# Altium PCB STM32.PcbDoc
Units mm, origin at the board's own origin, x right, y up, seen from the top; angles counter-clockwise.
Board outline 38.86 x 35.18 mm, 4 copper layers (L1 SIGNAL, L2 GROUND, L3 GROUND, L4 SIGNAL), stack 1.571 mm thick; 35 components, 27 nets, 170 pads, 85 vias.
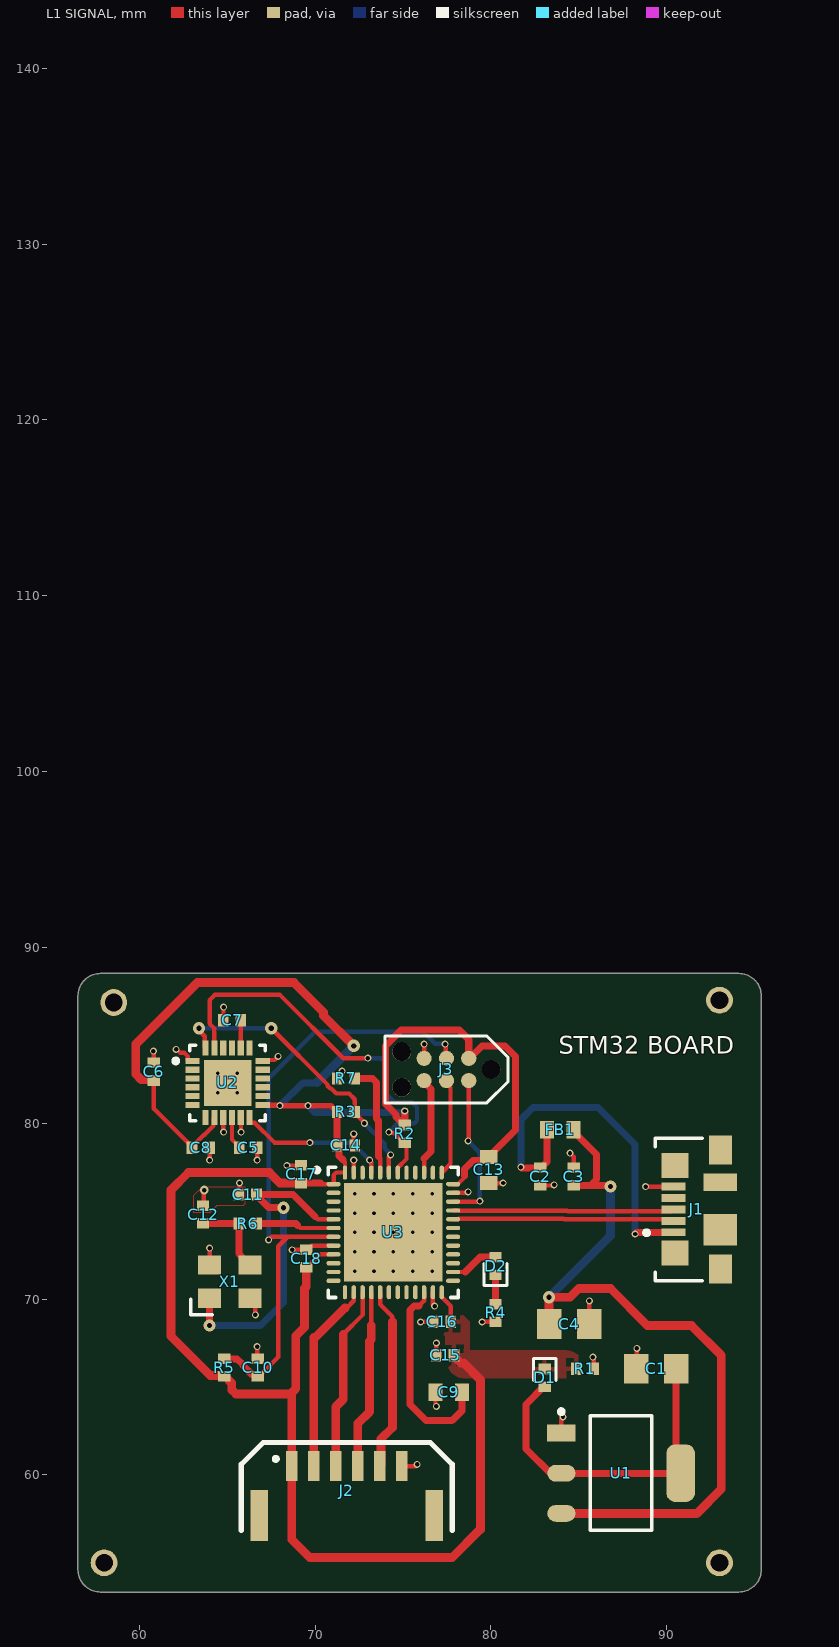
[diagram p0: L1 SIGNAL view]
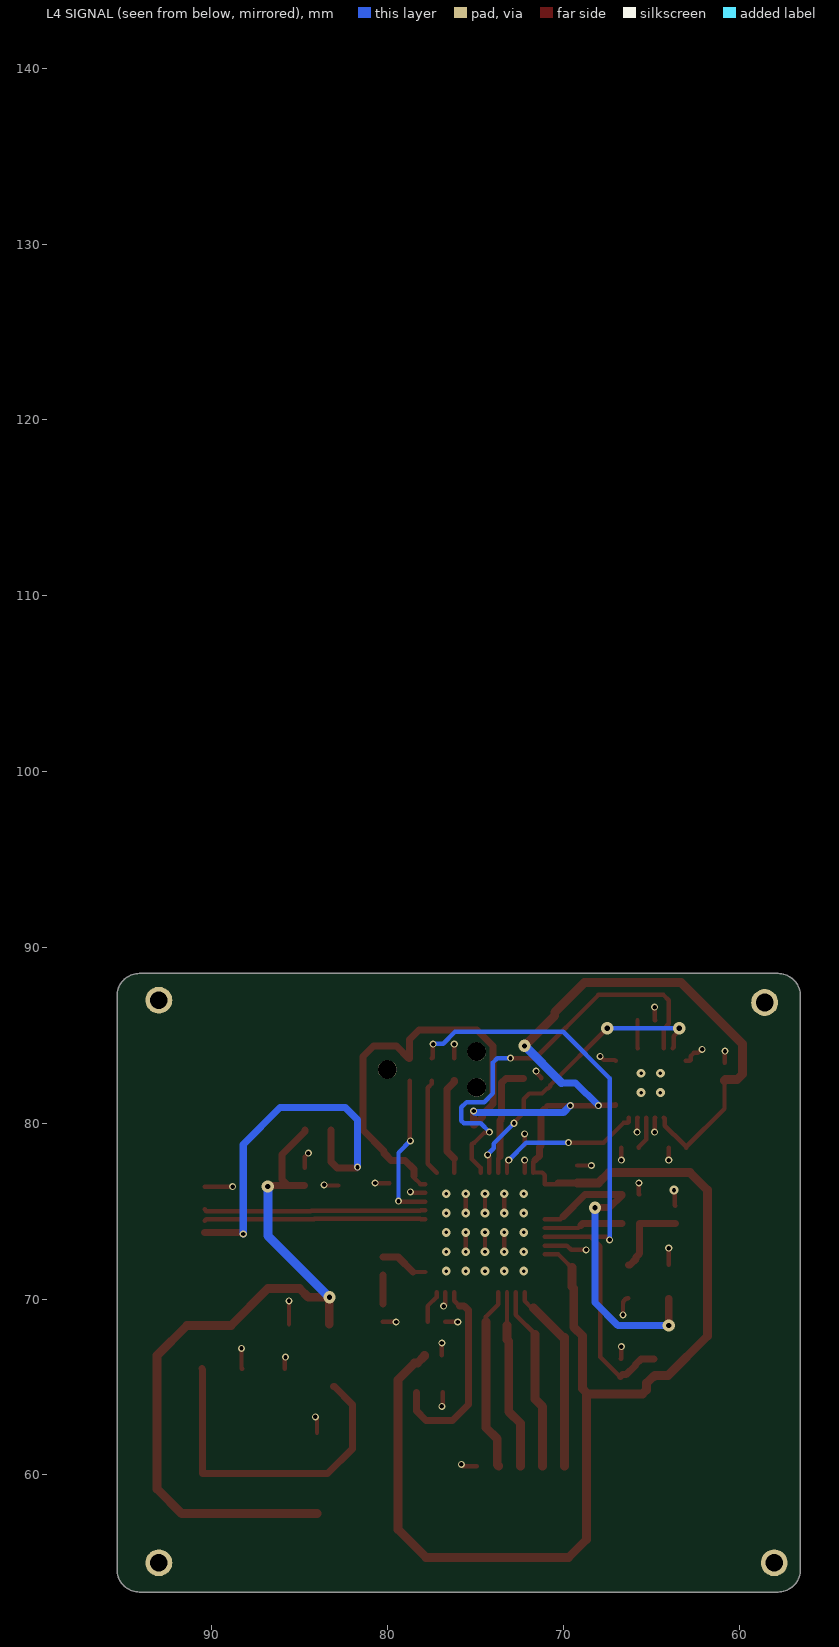
[diagram p1: L4 SIGNAL view, seen from below]
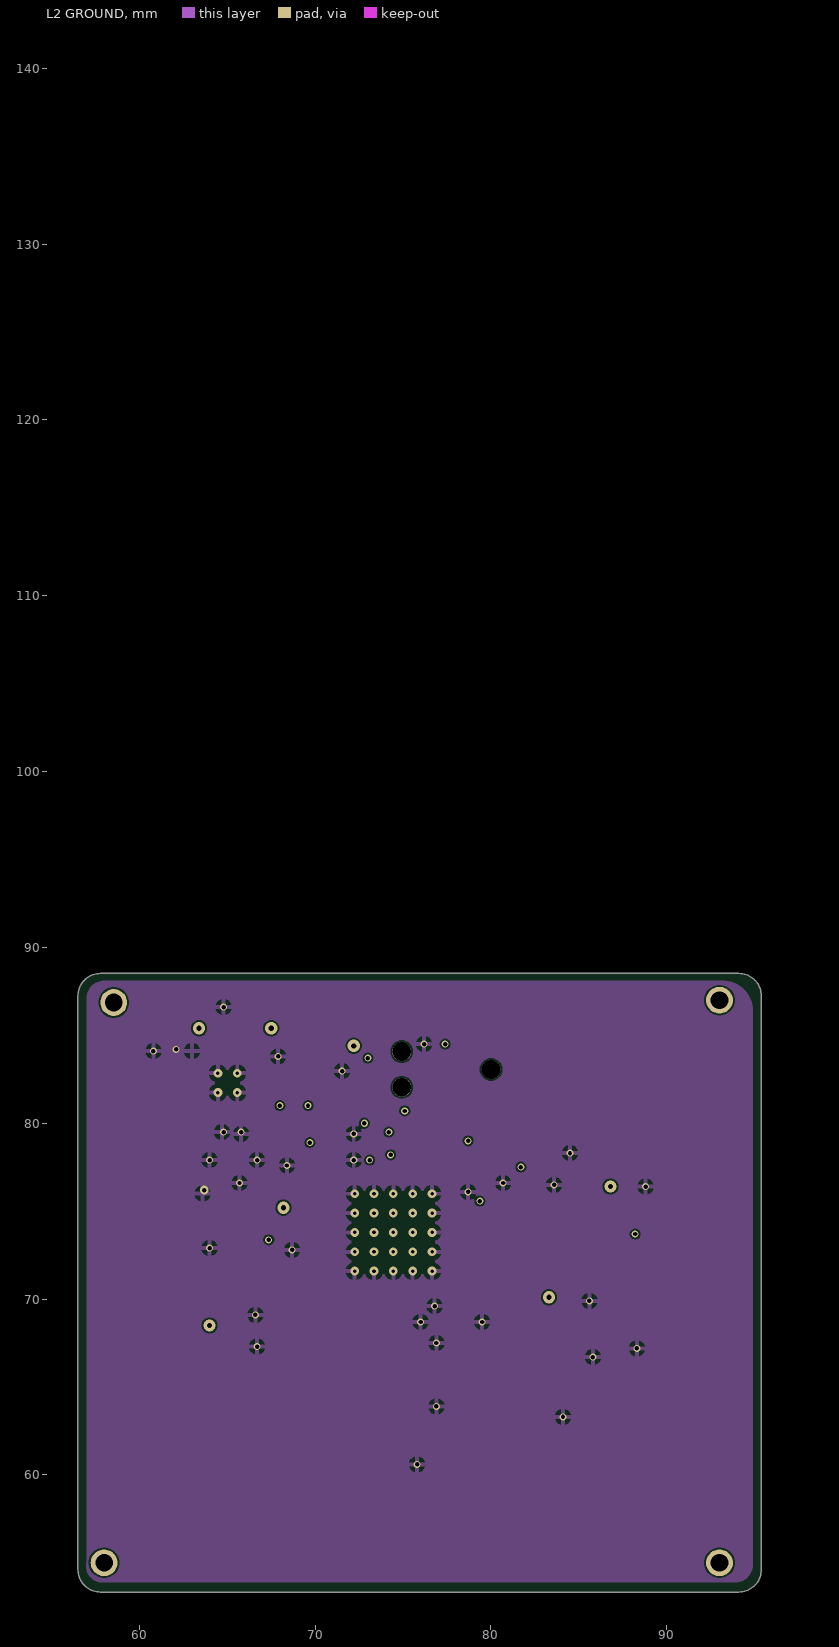
[diagram p2: L2 GROUND]
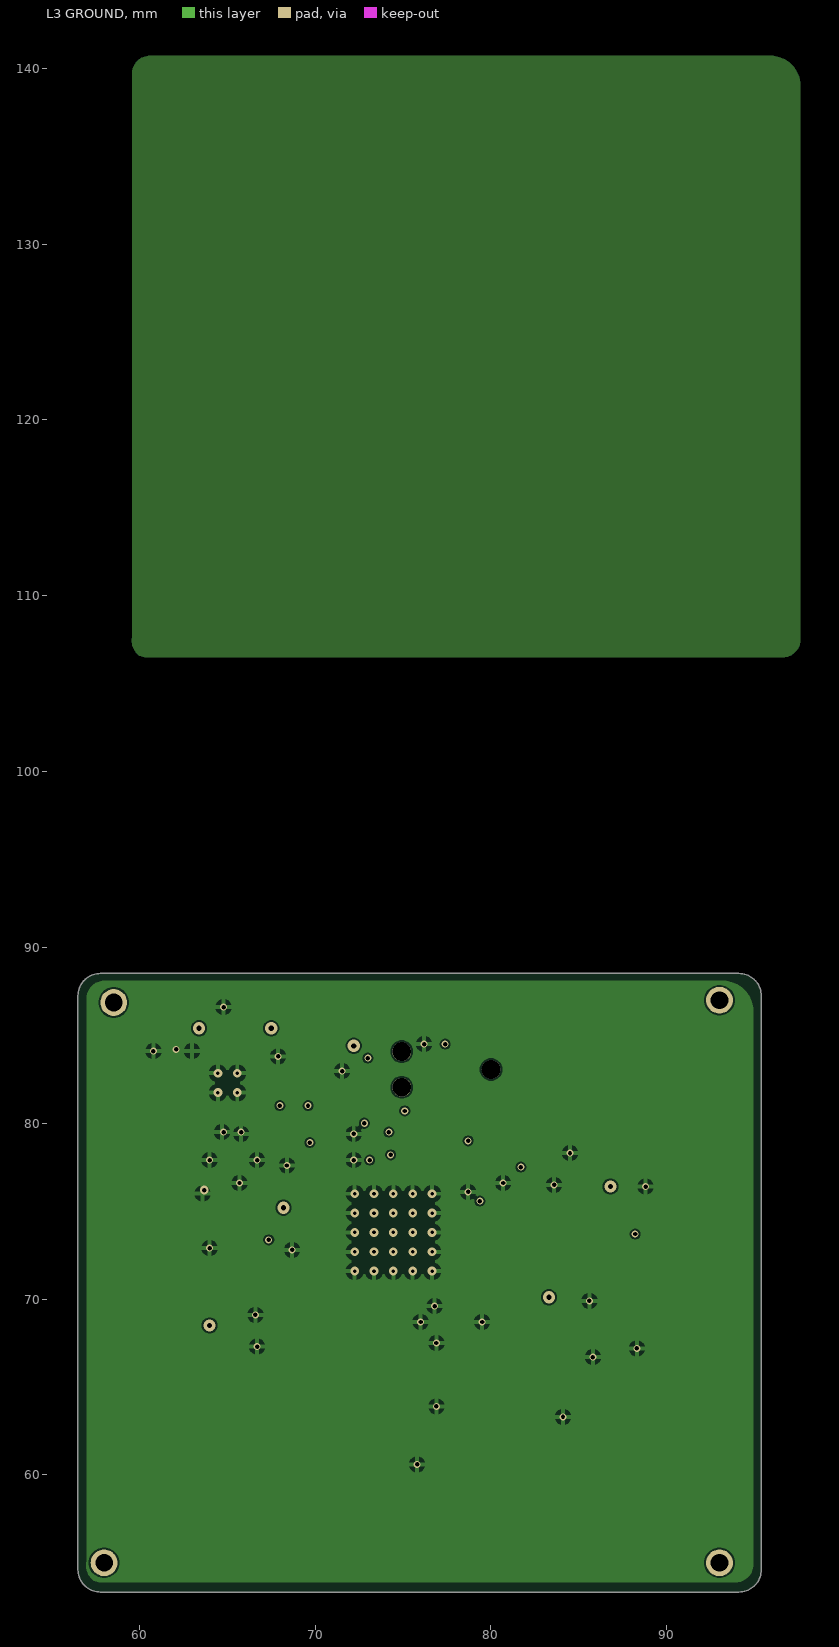
[diagram p3: L3 GROUND]
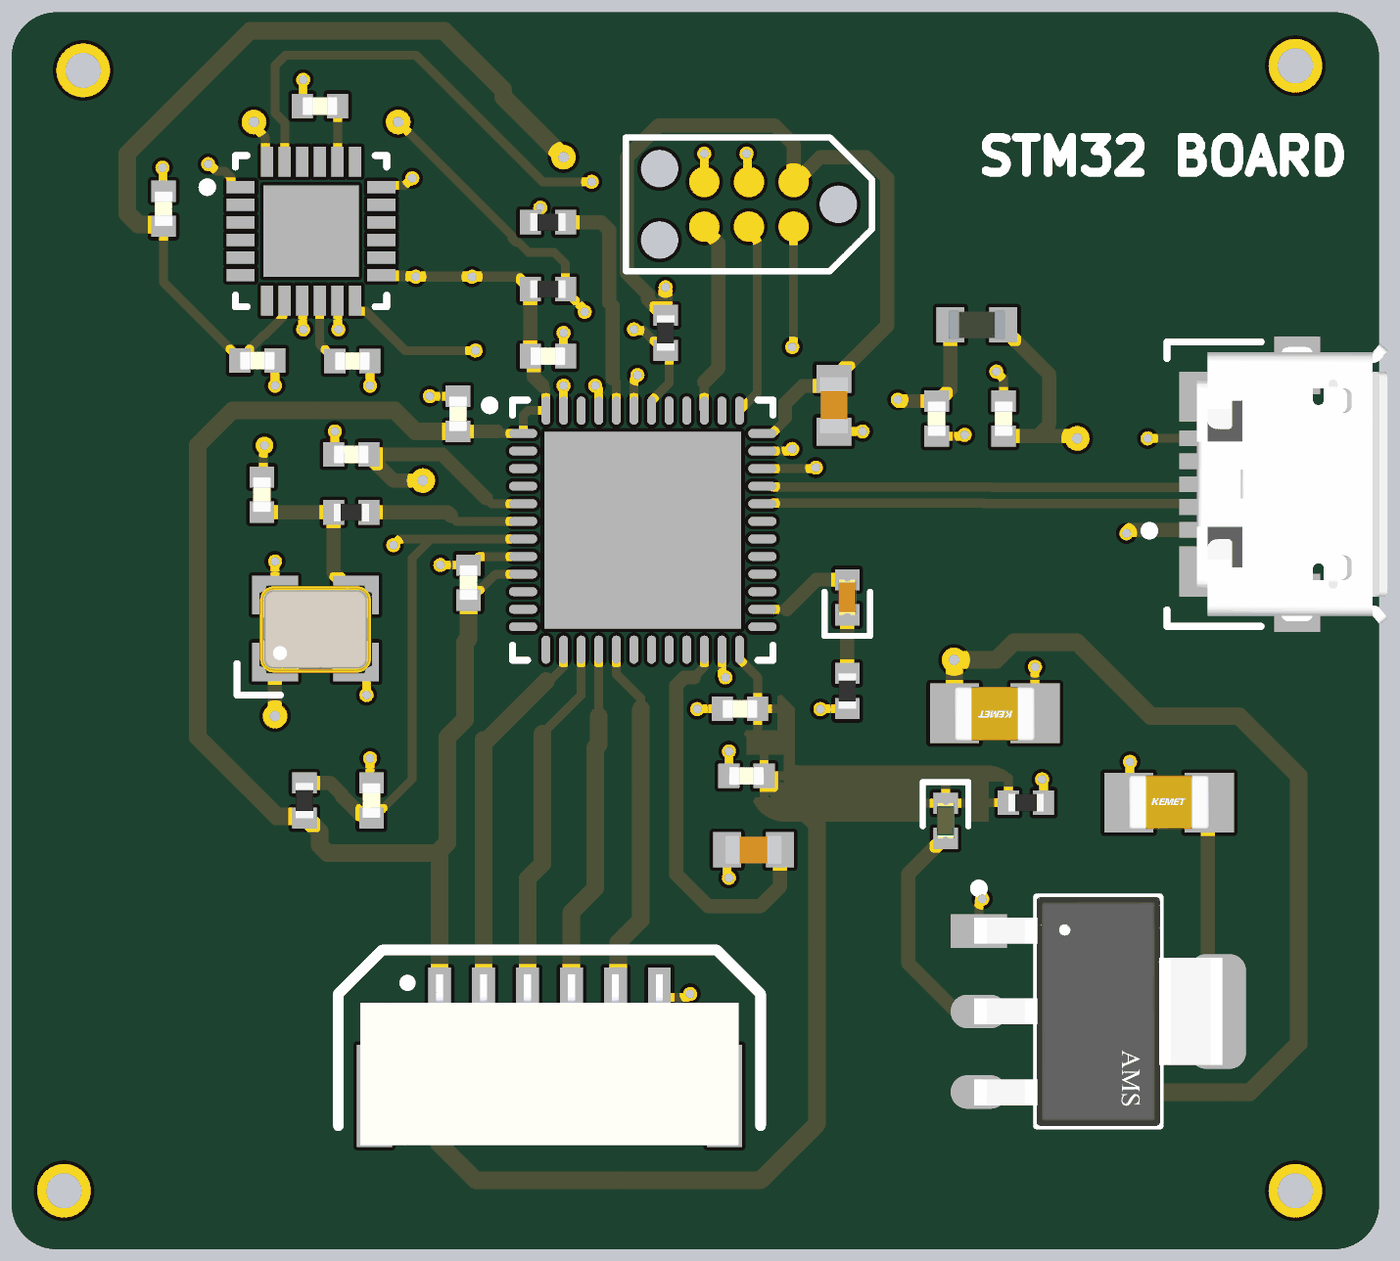
[diagram p4: 3D render of the assembled board from above, using the file's embedded part models]

## Layer stack, top to bottom
Top Solder: solder mask 0.0254, SM-001, Dk 4
L1 SIGNAL: signal copper 0.035
Dielectric 1: prepreg 0.2, PP-017, Dk 4.6
L2 GROUND: signal copper 0.018
Dielectric 3: core 1.065, Core-039, Dk 4.6
L3 GROUND: signal copper 0.018
Dielectric 5: prepreg 0.2, PP-017, Dk 4.6
L4 SIGNAL: signal copper 0.035
Bottom Solder: solder mask 0.0254, SM-001, Dk 4

## Board outline
56.515,54.61 56.515,87.249 cw(c57.785,87.249) 57.785,88.519 94.107,88.519 cw(c94.107,87.249) 95.377,87.249 95.377,54.61 cw(c94.107,54.61) 94.107,53.34 57.785,53.34 cw(c57.785,54.61)

## Design rules (kind name [scope] priority, off if disabled: settings)
Clearance [All] p1: gap=0.1 ignorepadtopadclearanceinfootprint=FALSE
DiffPairsRouting [All] p1: maxlimit=0.254 minlimit=0.203 mostfreqgap=0.254 toplayer_maxgap=0.203 toplayer_prefgap=0.203 toplayer_minwidth=0.26 toplayer_maxwidth=0.26 toplayer_prefwidth=0.26 bottomlayer_maxgap=0.203 bottomlayer_prefgap=0.203 bottomlayer_minwidth=0.26 bottomlayer_maxwidth=0.26 bottomlayer_prefwidth=0.26 impedanceprofiledriven=TRUE impedanceprofileid={10750222-0E24-40B5-9E8B-FD8138095507} impedanceprofilevalue=90.000000 maxuncoupledlength=12.7
MinimumSolderMaskSliver [All] p1: minsoldermaskwidth=0
PlaneConnect [All] p1: planeconnectstyle=Direct reliefexpansion=0.508 reliefentries=4 reliefconductorwidth=0.254 reliefairgap=0.254
PolygonConnect [All] p1: connectstyle=Relief reliefconductorwidth=0.254 reliefentries=4 polygonreliefangle="90 Angle" airgapwidth=0.254
RoutingVias [All] p1: holewidth=0.3 width=0.7 viastyle="Through Hole" minholewidth=0.2 minwidth=0.2 maxholewidth=0.5 maxwidth=1
SilkToSilkClearance [All] p1: silktosilkclearance=0.1
SilkToSolderMaskClearance [IsPad] p1: minsilkscreentomaskgap=0.1 clearancetoexposedcopper=TRUE
SolderMaskExpansion [All] p1: expansion=0.102 istentingtop=FALSE
UnRoutedNet [All] p1: checkbadconnections=TRUE
Width [All] p1: maxlimit=0.5 minlimit=0.2 preferedwidth=0.2
24 further rules are at their usual default settings.

## Classes and differential pairs
differential pair class "DIFF USB": USB_D
differential pair USB_D: +USB_D_P -USB_D_N

## Components (designator, comment, footprint, x,y, rotation, side; value= is the part's Value field where it differs from the comment)
C1 "22u" CAP_0805 89.408,66.04 r0 top
C2 "2n2" CAP_0402 82.804,76.962 r90 top
C3 "2n2" CAP_0402 84.709,76.962 r270 top
C4 "22u" CAP_0805 84.455,68.58 r180 top
C5 "100n" CAP_0402 66.2,78.6 r180 top
C6 "100n" CAP_0402 60.833,82.931 r270 top
C7 "2n2" CAP_0402 65.278,85.852 r0 top
C8 "100n" CAP_0402 63.5,78.613 r180 top
C9 "2u2" CAP_0603 77.6,64.7 r0 top
C10 "100n" CAP_0402 66.741,66.1 r270 top
C11 "10p" CAP_0402 66.167,75.946 r0 top
C12 "10p" CAP_0402 63.627,74.803 r270 top
C13 "2u2" CAP_0603 79.883,77.343 r90 top
C14 "100n" CAP_0402 71.755,78.74 r180 top
C15 "100n" CAP_0402 77.4,66.8 r0 top
C16 "100n" CAP_0402 77.216,68.707 r0 top
C17 "100n" CAP_0402 69.2,77.1 r270 top
C18 "100n" CAP_0402 69.5,72.3 r270 top
D1 "GREEN" LED_0402_GREEN 83.058,65.524 r90 top
D2 "RED" LED_0402_RED 80.264,71.882 r270 top
FB1 "120R" FB_0603 83.947,79.629 r0 top
J1 "473460001" FP-473460001-MFG 92.7,75.1 r90 top
J2 "SM06B-GHS-TB" SM06B-GHS-TB 71.8,59.1 r0 top
J3 "TC2030-NL" TC2030-NL-FP 77.47,83.058 r180 top
R1 "1K" RES_0402 85.344,66.04 r180 top
R2 "2K2" RES_0402 75.1,79.4 r90 top
R3 "2K2" RES_0402 71.755,80.645 r180 top
R4 "1K" RES_0402 80.264,69.215 r90 top
R5 "10K" RES_0402 64.836,66.1 r270 top
R6 "0R" RES_0402 66.167,74.295 r0 top
R7 "10K" RES_0402 71.755,82.55 r0 top
U1 "AMS1117-3.3" FP-AMS1117-IPC_A 87.4,60.1 r0 top
U2 "MPU-6050" IS-QFN-24_V 65.024,82.296 r0 top
U3 "STM32F411CEU6" STM-UFQFPN48_L 74.451,73.791 r0 top
X1 "24MHz" XTAL_3225 65.151,70.993 r0 top

## Footprints (in the part's own frame and the unit in brackets; to place one, negate y for a bottom-side part, rotate by r counter-clockwise, add the part's x,y. Pads: shape width x height; smd on the part's side, far side on the other; paste and mask are expansions set on the pad)
CAP_0402 [mm]
  rect 0.6x0.7 smd: 1(-0.5,0) 2(0.5,0)
  body extent -0.5,-0.26 0.5,0.26, height 0.37
CAP_0603 [mm]
  rect 0.8x1 smd: 1(-0.75,0) 2(0.75,0)
  body extent -0.8,-0.4 0.8,0.4, height 0.51
CAP_0805 [mm]
  rect 1.4x1.7 smd: 1(-1.143,0) 2(1.143,0)
  body extent -1.15,-0.76 1.15,0.79, height 1.01
FB_0603 [mm]
  rect 0.8x1 smd: 1(-0.75,0) 2(0.75,0)
  body extent -0.8,-0.4 0.8,0.4, height 0.81
FP-473460001-MFG [mm]
  rect 0.45x1.38 smd paste+0 mask+0: 1(-1.3,2.31) 2(-0.65,2.31) 3(0,2.31) 4(0.65,2.31) 5(1.3,2.31)
  rect 1.425x1.55 smd paste+0 mask+0: 6(-2.488,2.225) 7(2.488,2.225)
  rect 1.65x1.3 smd paste+0 mask+0: 8(-3.375,-0.35) 11(3.375,-0.35)
  rect 1.8x1.9 smd paste+0 mask+0: 9(-1.15,-0.35)
  rect 1x1.9 smd paste+0 mask+0: 10(1.55,-0.35)
  silkscreen extent -4.05,0.67 4.05,3.97, body extent -4.3,-2.48 4.3,3.45, height 0.25
FP-AMS1117-IPC_A [mm]
  rect 1.604x0.952 smd paste+0 mask+0: 1(-3.395,2.29)
  rrect100% 1.604x0.952 smd paste+0 mask+0: 2(-3.395,0) 3(-3.395,-2.29)
  rrect59% 1.604x3.262 smd paste+0 mask+0: 4(3.395,0)
  silkscreen extent -3.52,-3.25 1.75,3.62, body extent -4.7,-3.75 4.7,3.75, height 0.25
IS-QFN-24_V [mm] "QFN, 24-Leads, Body 4x4mm, Pitch 0.5mm, Thermal Pad 2.7x2.6mm"
  rect 0.8x0.35 smd: 1(-2,1.25) 2(-2,0.75) 3(-2,0.25) 4(-2,-0.25) 5(-2,-0.75) 6(-2,-1.25) 13(2,-1.25) 14(2,-0.75) 15(2,-0.25) 16(2,0.25) 17(2,0.75) 18(2,1.25)
  rect 0.35x0.85 smd mask+0.102: 7(-1.25,-1.975) 8(-0.75,-1.975) 9(-0.25,-1.975) 10(0.25,-1.975) 11(0.75,-1.975) 12(1.25,-1.975) 19(1.25,1.975) 20(0.75,1.975) 21(0.25,1.975) 22(-0.25,1.975) 23(-0.75,1.975) 24(-1.25,1.975)
  rect 2.7x2.6 smd: 25(0,0)
  silkscreen extent -3.07,-2.15 2.15,2.15, body extent -2,-2 2,2, height 0.95
LED_0402_GREEN [mm]
  rect 0.6x0.7 smd: A(-0.5,0) K(0.5,0)
  silkscreen extent -0.15,-0.65 1.1,0.65, body extent -0.51,-0.25 0.51,0.25, height 0.45
LED_0402_RED [mm]
  rect 0.6x0.7 smd: A(-0.5,0) K(0.5,0)
  silkscreen extent -0.15,-0.65 1.1,0.65, body extent -0.51,-0.25 0.51,0.25, height 0.45
RES_0402 [mm]
  rect 0.6x0.7 smd: 1(-0.5,0) 2(0.5,0)
  body extent -0.5,-0.25 0.5,0.25, height 0.3
SM06B-GHS-TB [mm]
  rect 0.65x1.7 smd: 1(-3.125,1.4) 2(-1.875,1.4) 3(-0.625,1.4) 4(0.625,1.4) 5(1.875,1.4) 6(3.125,1.4)
  rect 1x2.9 smd: ""(-4.975,-1.4) ""(4.975,-1.4)
  silkscreen extent -6,-2.25 6,2.75, body extent -5.38,-2.8 5.38,2.05, height 4.26
STM-UFQFPN48_L [mm] "QFN, 48-Leads, Body 7.1x7.1mm, Pitch 0.5mm, Thermal Pad 5.6x5.6mm, IPC High Density"
  oval 0.8x0.25 smd: 1(-3.4,2.75) 2(-3.4,2.25) 3(-3.4,1.75) 4(-3.4,1.25) 5(-3.4,0.75) 6(-3.4,0.25) 7(-3.4,-0.25) 8(-3.4,-0.75) 9(-3.4,-1.25) 10(-3.4,-1.75) 11(-3.4,-2.25) 12(-3.4,-2.75) 25(3.4,-2.75) 26(3.4,-2.25) 27(3.4,-1.75) 28(3.4,-1.25) 29(3.4,-0.75) 30(3.4,-0.25) 31(3.4,0.25) 32(3.4,0.75) 33(3.4,1.25) 34(3.4,1.75) 35(3.4,2.25) 36(3.4,2.75)
  oval 0.25x0.8 smd: 13(-2.75,-3.4) 14(-2.25,-3.4) 15(-1.75,-3.4) 16(-1.25,-3.4) 17(-0.75,-3.4) 18(-0.25,-3.4) 19(0.25,-3.4) 20(0.75,-3.4) 21(1.25,-3.4) 22(1.75,-3.4) 23(2.25,-3.4) 24(2.75,-3.4) 37(2.75,3.4) 38(2.25,3.4) 39(1.75,3.4) 40(1.25,3.4) 41(0.75,3.4) 42(0.25,3.4) 43(-0.25,3.4) 44(-0.75,3.4) 45(-1.25,3.4) 46(-1.75,3.4) 47(-2.25,3.4) 48(-2.75,3.4)
  rect 5.6x5.6 smd: 49(0,0)
  silkscreen extent -4.47,-3.7 3.7,3.7, body extent -3.55,-3.55 3.55,3.55, height 0.6
TC2030-NL-FP [mil]
  round 33.98 smd paste-16.99: 1(-50,-25) 2(-50,25) 3(0,-25) 4(0,25) 5(50,-25) 6(50,25)
  round 42.01 hole 42.01 unplated: MH(-100,0) MH(100,-40) MH(100,40)
  silkscreen extent -138,-75 138,75
XTAL_3225 [mm]
  rect 1.3x1.1 smd: 1(-1.15,-0.95) 2(1.15,-0.95) 3(1.15,0.95) 4(-1.15,0.95)
  silkscreen extent -2.23,-1.89 -1,-1, body extent -1.6,-1.28 1.6,1.22, height 0.61

## Part data
C1 C4: library part CAP_0805_16V, "Capacitor SMD 0805 16V"
C2 C3 C5 C6 C7 C8 C10 C11 C12 C14 C15 C16 C17 C18: library part CAP_0402_16V, "Capacitor SMD 0402 16V"
C9 C13: library part CAP_0603_16V, "Capacitor SMD 0603 16V"
D1: library part LED_0402_GREEN, "LED 0402 GREEN SMD"
D2: library part LED_0402_RED, "LED 0402 RED SMD"
FB1: library part FB_0603, "Ferrite Bead SMD 0603"
J1: library part CMP-2000-05246-2, "CONN RCPT USB2.0 MICRO B SMD R/A", Current Rating=1.8A, Manufacturer=Molex, Package=0, Temperature="-30°C to +85°C", Temperature Range High=+85°C, Temperature Range Low=-30°C, Voltage Rating=30V, Automotive=No, Category=Conn, ComponentLink2Description=Datasheet, ComponentLink2URL=https://www.molex.com/webdocs/datasheets/pdf/en-us/0473460001_IO_CONNECTORS.pdf, Conn Orientation="Right Angle", Contact Material=Gold,Nickel, Device Class L1=Connectors, Device Class L2="USB Connectors", Device Class L3=unset, Digikey Description="CONN RCPT USB2.0 MICRO B SMD R/A", Footprint Url=https://www.molex.com/pdm_docs/sd/473460001_sd.pdf, Height=2.945mm, Is Female=yes, Lead Free=Yes, Manufacturer Part Number=473460001, Number of Contacts=5, Octopart=https://octopart.com/47346-0001-molex-7164928, Pitch=0.65mm, RoHS=TRUE, Shielding=true, Usb Standard="USB 2.0"
J2: "Header Connector 6 Position 1.25MM Pitch SMD Horizontal JST GH", Manufacturer=JST, Manufacturer Part Number=SM06B-GHS-TB
J3: "Tag-Connect No-Solder SWD Debug Connector (No Legs) DO NOT PLACE", Manufacturer=Tag-Connect, Manufacturer Part Number=TC2030-NL-FP
R1 R2 R3 R4 R5 R6 R7: library part RES_0402, "Resistor SMD 0402"
U1: library part CMP-209535-000001-1, "LDO Voltage Regulators 1A, 3.3V", Dropout Voltage=1.1V, Manufacturer="Advanced Monolithic Systems", Max Junction Temp=+125°C, Max Power Dissipation=1.2W, Max Supply Voltage=15V, Nominal Supply Current=5mA, Output Current=1A, Output Voltage=3.3V, Package=AMS1117, Temperature="-40°C to +125°C", Temperature Range Low=-40°C, Automotive=No, Category=IC, ComponentLink2Description=Datasheet, ComponentLink2URL=http://www.advanced-monolithic.com/pdf/ds1117.pdf, Device Class L1="Integrated Circuits (ICs)", Device Class L2="Power Management ICs", Device Class L3="Voltage Regulators - Linear", Height=1.8mm, Ipc Land Pattern Name=SOT229P700X180-4, Lead Free=Yes, Manufacturer Part Number=AMS1117-3.3, Number of Outputs=1, Octopart=https://octopart.com/ams1117-3.3-advanced+monolithic+systems-25899300, Output Type=Fixed, RoHS=TRUE, Standoff Height=0.64mm, Temperature Range High=+125°C
U2: library part CMP-1753-00002-2, "3-Axis Gyroscope, Accelerometer and a Digital Motion Processor(TM) (DMP), 2.375 to 3.46 V, -40 to 85 degC, 24-Pin QFN, RoHS, Tape and Reel", Manufacturer=InvenSense, Standard Package=5,000, Category=Sensors,Transducers, Datasheet URL=http://datasheet.octopart.com/MPU-6050-InvenSense-datasheet-14421344.pdf, Datasheet Version="Rev. 3.3, 05/2012", Dynamic Catalog=MPU-6000™Series, Family=Multifunction, Featured Product=MPU-60506-Axis,IntegratedI²CSolution, Manufacturer URL=http://www.invensense.com/, Online Catalog=MPU-6000™Series, Other Names="1428-1007-2 / MPU6050", Output Type=Digital, Sensor Type=MotionTracking, Unit PriceUSD=Digital
U3: library part CMP-0243-00165-1, "ARM Cortex-M4 32-bit MCU+FPU, 512 KB Flash, 128 KB RAM, 36 I/Os, 48-Pin UFQFPN, -40 to 85 degC, Tray", I/Os (High Current)=36, Operating Frequency(F) (Processor speed) (MHz)=100, Package Description=UFQFPN48, Package Reference="48-Pin Ultra Thin Fine Pitch Quad Flat No-Lead, 7 x 7 x 0.6 mm Body, 0.5 mm Pitch, Exposed Pad", Supply Voltage(Vcc) min (V)=1.7, ComponentLink1Description="Manufacturer URL", ComponentLink1URL=http://www.st.com/, ComponentLink2Description=Datasheet, ComponentLink2URL=http://www.st.com/st-web-ui/static/active/en/resource/technical/document/datasheet/DM00115249.pdf, Core="ARM Cortex-M4", DatasheetVersion="Rev. 6", FLASH Size (Prog) (kB)=512, Internal RAM Size (kB)=128, Mounting Technology="Surface Mount", Packing=Tray
X1: library part TSX-3225_24.0000MF15X-AC, "Crystal SMD 24MHz 10PPM 7pF 3225", Manufacturer=Epson, Manufacturer Part Number="TSX-3225 24.0000MF15X-AC"

## Free pads (board coordinates)
  round 1.524 hole 1: 7(93,87) 8(93,55) 9(58,55) H(58.547,86.868)

## Via types
v1: diameter 0.4, hole 0.25, L1 SIGNAL to L4 SIGNAL, 48 vias
v2: diameter 0.5, hole 0.2, L1 SIGNAL to L4 SIGNAL, 29 vias
v3: diameter 0.7, hole 0.3, L1 SIGNAL to L4 SIGNAL, 7 vias
v4: diameter 0.5, hole 0.25, L1 SIGNAL to L4 SIGNAL, 1 vias

## Nets (pads, with @x,y where several pads share a name; then routed paths per layer and width w, separated by ;. In a path a pad name is that pad's centre, name@x,y a point inside that pad or via, vN(x,y) a via of type N, cw(c..) or ccw(c..) an arc to the next point about the centre after c; other vN are vias at no path point)
+5: C3.2 C4.2 FB1.2 U1.3 | length 44.1
  L1 SIGNAL w0.4: FB1.2 84.697,79.529 86,78.226 86,76.8 85.662,76.462 ; C3.2 85.662,76.462 ; v3(86.8,76.4) 86.738,76.462 85.662,76.462
  L1 SIGNAL w0.5: C4.2 83.306,68.586 83.306,70.094 v3(83.3,70.1) 84.5,70.1 85,70.6 86.8,70.6 88.9,68.5 91.4,68.5 93.1,66.8 93.1,59.2 91.7,57.8 84.015,57.8 U1.3
  L4 SIGNAL w0.5: v3(83.3,70.1) 86.8,73.6 v3(86.8,76.4)
GND: C1.1 C2.1 C3.1 C4.1 C5.1 C6.1 C7.1 C8.1 C9.1 C10.1 C11.1 C12.1 C13.1 C14.1 C15.1 C16.1 C17.1 C18.1 J1.5 J2.6 J3.5 R1.1 R4.1 R7.1 U1.1 U2.1 U2.9 U2.11 U2.18 U2.25 U3.8 U3.23 U3.35 U3.47 U3.49 X1.2 X1.4 | length 37.8
  L1 SIGNAL w0.25: v1(60.8,84.1) 60.817,84.083 60.817,83.447 C6.1 ; v1(62.1,84.2) 62.141,84.2 62.341,84 62.57,84 62.749,83.821 62.749,83.596 62.799,83.546 U2.1 ; C12.1 63.663,75.339 63.663,76.164 v4(63.7,76.2) ; X1.4 v1(64,72.9) ; v1(64,77.9) C8.1 ; U2.9 64.787,80.308 64.787,79.513 v1(64.8,79.5) ; C7.1 64.789,85.863 64.789,86.589 v1(64.8,86.6) ; C11.1 ccw(c65.667,75.979) 65.7,75.979 v1(65.7,76.6) ; U2.11 65.787,80.308 65.787,79.513 v1(65.8,79.5) ; X1.2 cw(c66.301,69.744) 66.6,69.744 v1(66.6,69.1) ; v1(66.7,67.3) 66.7,66.641 ccw(c66.741,66.641) C10.1 ; v1(66.7,77.9) C5.1 ; U2.18 67.074,83.596 67.696,83.596 v1(67.9,83.8) ; v1(68.4,77.6) C17.1 ; v1(68.7,72.8) 69.55,72.8 69.791,73.041 U3.8 ; R7.1 71.255,82.6 71.51,82.855 71.51,82.932 v1(71.539,82.961) ; U3.47@72.2,77.191 v1(72.2,77.9) ; v1(72.2,79.4) 72.2,78.795 ccw(c72.255,78.795) C14.1 ; v2(73.351,72.691) v2(73.351,73.791) ; v2(73.351,74.891) v2(73.351,75.991) ; v2(74.451,72.691) v2(74.451,73.791) ; v2(74.451,74.891) v2(74.451,75.991) ; J2.6 75.7,60.5 ccw(c75.7,60.6) v1(75.8,60.6) ; v2(75.551,72.691) v2(75.551,73.791) ; v2(75.551,74.891) v2(75.551,75.991) ; v1(76,68.7) 76,68.707 C16.1 ; J3.5 v1(76.2,84.5) ; U3.23 76.701,69.699 ccw(c76.8,69.699) v1(76.8,69.6) ; C9.1 76.85,63.95 ccw(c76.9,63.95) v1(76.9,63.9) ; C15.1 v1(76.9,67.5) ; U3.35 78.641,76.041 ccw(c78.641,76.1) v1(78.7,76.1) ; v1(79.5,68.7) 79.5,68.715 R4.1 ; C13.1 80.7,76.593 v1(80.7,76.6) ; C2.1 83.562,76.462 ccw(c83.562,76.5) v1(83.6,76.5) ; U1.1 84.005,63.205 cw(c84.1,63.205) v1(84.1,63.3) ; v1(84.5,78.3) 84.5,78.293 84.709,78.084 C3.1 ; C4.1 85.598,69.9 v1(85.6,69.9) ; v1(85.8,66.7) cw(c85.8,66.656) 85.844,66.656 R1.1 ; C1.1 ccw(c88.265,66.075) 88.3,66.075 v1(88.3,67.2) ; v1(88.8,76.4) J1.5
  other v2: 72.251,71.591 73.351,71.591 74.451,71.591 75.551,71.591 76.651,71.591 72.251,72.691 76.651,72.691 72.251,73.791 76.651,73.791 72.251,74.891 76.651,74.891 72.251,75.991 76.651,75.991 64.474,81.746 65.574,81.746 64.474,82.846 65.574,82.846
"IMU INT": U2.12 U3.45 | length 8.7
  L1 SIGNAL w0.25: U2.12 66.274,80.071 66.324,80.021 66.574,80.021 67.695,78.9 v1(69.7,78.9) ; v1(73.1,77.9) 73.201,77.799 U3.45
  L4 SIGNAL w0.25: v1(69.7,78.9) 72.1,78.9 v1(73.1,77.9)
"IMU SCL": R2.1 U2.23 U3.42 | length 24.2
  L1 SIGNAL w0.25: U2.23 64.274,85.388 64,85.662 64,87 64.3,87.3 68,87.3 71.6,83.7 v1(73,83.7) ; v1(74.2,79.5) 74.229,79.471 74.479,79.471 75.05,78.9 R2.1 75.2,78.8 75.2,77.965 74.701,77.466 U3.42
  L4 SIGNAL w0.25: v1(73,83.7) 73.754,83.7 74,83.454 74,81.7 74.5,81.2 75.5,81.2 75.796,80.904 75.796,80.143 75.65,79.996 74.696,79.996 v1(74.2,79.5)
"IMU SDA": R3.1 U2.24 U3.43 | length 16.9
  L1 SIGNAL w0.25: v3(63.4,85.4) 63.4,85.278 63.724,84.954 63.724,84.321 U2.24 ; v3(67.5,85.4) 70.73,82.17 70.73,82.107 70.862,81.975 70.925,81.975 71.208,81.692 71.933,81.692 72.255,81.37 R3.1 72.255,80.595 72.8,80.05 v1(72.8,80) ; U3.43 74.201,78.06 74.3,78.159 v1(74.3,78.2)
  L4 SIGNAL w0.25: v3(63.4,85.4) v3(67.5,85.4) ; v1(72.8,80) 73.955,78.845 73.955,78.586 74.3,78.241 v1(74.3,78.2)
"IPU CPOUT": C7.2 U2.20 | length 1.6
  L1 SIGNAL w0.25: U2.20 65.776,84.273 65.776,85.85 C7.2
"IPU REGOUT": C5.2 U2.10 | length 1.9
  L1 SIGNAL w0.25: U2.10 65.274,79.076 65.7,78.65 C5.2
"LED Anode": D2.A U3.26 | length 2.8
  L1 SIGNAL w0.25: U3.26 78.541,71.541
  L1 SIGNAL w0.4: 78.541,71.541 79.382,72.382 D2.A
"LED Cathode": D2.K R4.2 | length 1.7
  L1 SIGNAL w0.4: R4.2 D2.K
"LED PWR": C6.2 C8.2 C13.2 C14.2 C15.2 C16.2 C17.2 C18.2 D1.K J2.1 J3.1 R1.2 R2.2 R3.2 R5.2 U2.8 U2.13 U3.1 U3.9 U3.24 U3.36 U3.48 | length 139.3
  L1 SIGNAL w0.25: C6.2 60.833,80.83 C8.2@63,78.663 ; C8.2 C8.2@63,78.663 ; U2.8 64.224,80.271 64.224,79.853 63.717,79.345 63.682,79.345 C8.2@63,78.663 ; C18.2 69.55,71.8 69.725,71.975 69.725,71.99 70.276,72.541 U3.9 ; 70.3,76.6 70.359,76.541 U3.1 71.051,77.054 71.197,77.2 U3.48@71.701,77.2 ; 71.6,77.9 71.701,77.799 U3.48@71.701,77.2 ; U3.48 U3.48@71.701,77.2 ; U3.24 77.201,70.116 77.716,69.601 C16.2 ; U3.36 78.126,76.541 78.5,76.915 78.5,77
  L1 SIGNAL w0.3: U2.13 67.049,81.021 67.679,81.021 67.681,81.019 67.981,81.019 v1(68,81) v1(69.6,81) 70.9,81 71.055,80.845 71.105,80.845 71.255,80.695 R3.2
  L1 SIGNAL w0.4: C17.2 70.3,76.6 ; R3.2 C14.2 71.355,78.64 71.355,78.145 71.6,77.9 ; v1@75.1,80.6 R2.2 75.05,79.9 74.6,80.35 74.6,80.5 74,81.1 74,84.4 74.9,85.3 78.2,85.3 78.74,84.76 J3.1 78.785,83.693 79.492,84.4 80.8,84.4 81.4,83.8 81.4,79.61 80.183,78.393 80.183,78.293 79.783,77.893 78.993,77.893 78.5,77.4 78.5,77
  L1 SIGNAL w0.5: C6.2 60.783,82.481 60.119,82.481 59.8,82.8 59.8,84.5 63.3,88 68.8,88 70.481,86.319 70.481,86.119 v3(72.2,84.4) ; C17.2 68,76.6 67.4,77.2 62.8,77.2 61.8,76.2 61.8,67.9 64.05,65.65 64.786,65.65 R5.2 64.886,65.6 65.266,65.22 65.266,64.834 65.5,64.6 68.6,64.6 68.675,64.675 ; C18.2 69.5,70.7 69.4,70.6 69.4,68.4 68.9,67.9 68.9,64.9 68.675,64.675 ; C15.2 77.9,66.75 78.288,66.362 78.454,66.362 79.4,65.416 79.4,56.9 77.8,55.3 69.7,55.3 68.675,56.325 J2.1 68.675,64.675
  L4 SIGNAL w0.4: v1(68,81) 69.3,82.3 70.1,82.3 ; v1(69.6,81) 70,80.6 75,80.6 v1(75.1,80.7)
  L4 SIGNAL w0.5: 70.1,82.3 v3(72.2,84.4)
"MCU BOOT0": R7.2 U3.44 | length 6.5
  L1 SIGNAL w0.25: 73.6,78.1 73.701,77.999 U3.44
  L1 SIGNAL w0.4: R7.2 73.266,82.55 73.5,82.316 73.5,80.258 73.6,80.158 73.6,78.1
"MCU NRST": C10.2 J3.3 R5.1 U3.7 | length 36.2
  L1 SIGNAL w0.25: C10.2 66.791,65.6 67.9,66.709 67.9,73 68.441,73.541 ; v1(67.364,73.364) 67.541,73.541 68.441,73.541 ; U3.7 68.441,73.541 ; v1(77.4,84.5) 77.429,84.471 77.429,83.734 J3.3
  L1 SIGNAL w0.4: R5.1 65.564,66.6 65.895,66.269 65.895,66.231 66.425,65.7 66.641,65.7 C10.2
  L4 SIGNAL w0.25: v1(67.364,73.364) 67.364,82.564 70,85.2 76.159,85.2 76.831,84.529 77.371,84.529 v1(77.4,84.5)
"MCU OSC IN": C11.2 U3.5 X1.1 | length 18.3
  L1 SIGNAL w0.25: 70,74.7 70.159,74.541 U3.5
  L1 SIGNAL w0.4: v3(64,68.5) X1.1 X1.1 ; v3@68,75.2 67.363,75.2 66.667,75.896 C11.2 68.754,75.946 70,74.7
  L4 SIGNAL w0.4: v3(64,68.5) 66.9,68.5 68.2,69.8 v3(68.2,75.2)
"MCU OSC OUT": R6.2 U3.6 | length 4.5
  L1 SIGNAL w0.25: 69,74.2 69.159,74.041 U3.6
  L1 SIGNAL w0.4: R6.2 68.905,74.295 69,74.2
"MCU PA4": J2.2 U3.14 | length 11
  L1 SIGNAL w0.25: 71.7,69.5 71.8,69.5 72.201,69.901 U3.14
  L1 SIGNAL w0.5: J2.2 69.925,67.825 70.025,67.825 71.7,69.5
"MCU PA5": J2.3 U3.15 | length 10.5
  L1 SIGNAL w0.25: 71.6,68 72.701,69.101 U3.15
  L1 SIGNAL w0.5: J2.3 71.175,63.875 71.6,64.3 71.6,68
"MCU PA6": J2.4 U3.16 | length 10.2
  L1 SIGNAL w0.25: 73.2,68.5 73.201,68.501 U3.16
  L1 SIGNAL w0.5: J2.4 72.425,62.925 73.1,63.6 73.1,67.6 73.2,67.7 73.2,68.5
"MCU PA7": J2.5 U3.17 | length 10.5
  L1 SIGNAL w0.25: U3.17 73.701,69.699 74.4,69 74.4,68.7
  L1 SIGNAL w0.5: J2.5 73.75,60.575 73.75,62.05 74.4,62.7 74.4,68.7
"MCU SWCLK": J3.4 U3.37 | length 5.5
  L1 SIGNAL w0.25: U3.37 77.701,77.691 77.701,82.026 77.47,82.257 J3.4
"MCU SWDIO": J3.2 U3.34 | length 8.7
  L1 SIGNAL w0.25: U3.34 79.341,75.541 v1(79.371,75.571) v1@79.4,75.6 ; v1(78.7,79) 78.74,79.04 J3.2
  L4 SIGNAL w0.25: v1(78.7,79) 79.371,78.329 v1(79.371,75.571)
"MCU SWO": J3.6 U3.39 | length 5.6
  L1 SIGNAL w0.26: 76.2,78 76.201,77.999 U3.39
  L1 SIGNAL w0.4: 76.2,78 76.6,78.4 76.6,81.957 76.2,82.357 J3.6
"MCU VCAP1": C9.2 U3.22 | length 11.5
  L1 SIGNAL w0.25: 75.9,69.6 76.201,69.901 U3.22
  L1 SIGNAL w0.4: 75.9,69.6 75.634,69.6 75.4,69.366 75.4,64 76.3,63.1 77.8,63.1 78.35,63.65 C9.2
NetC1_2: C1.2 D1.A U1.2 U1.4 | length 19.1
  L1 SIGNAL w0.4: D1.A 83.008,65.024 82,64.016 82,61.472 83.401,60.071 83.727,60.071 90.517,60.071 90.517,66.006 C1.2
USB_D_N: J1.2 U3.32 | length 12.6
  L1 SIGNAL w0.26: U3.32 78.116,74.541 78.134,74.559 84.152,74.559 84.168,74.543 90.297,74.543 J1.2
USB_D_P: J1.3 U3.33 | length 12.6
  L1 SIGNAL w0.26: U3.33 78.116,75.041 78.134,75.023 84.344,75.023 84.36,75.007 90.297,75.007 J1.3
VBUS: C2.2 FB1.1 J1.1 | length 21.2
  L1 SIGNAL w0.4: v1(81.7,77.5) 81.738,77.462 C2.2 82.854,77.462 83.197,77.805 FB1.1 ; v1(88.2,73.7) 88.3,73.8 J1.1
  L4 SIGNAL w0.4: v1(81.7,77.5) 81.7,80.2 82.4,80.9 86.1,80.9 88.2,78.8 v1(88.2,73.7)
"XTAL IN": C12.2 R6.1 X1.3 | length 4.7
  L1 SIGNAL w0.4: C12.2 63.631,74.299 65.663,74.299 65.663,72.581 65.851,72.393 65.851,72.293 66.201,71.943 X1.3
pads on no net: J1.4 J1.6 J1.7 J1.8 J1.9 J1.10 J1.11 J2. J3.MH U2.2 U2.3 U2.4 U2.5 U2.6 U2.7 U2.14 U2.15 U2.16 U2.17 U2.19 U2.21 U2.22 U3.2 U3.3 U3.4 U3.10 U3.11 U3.12 U3.13 U3.18 U3.19 U3.20 U3.21 U3.25 U3.27 U3.28 U3.29 U3.30 U3.31 U3.38 U3.40 U3.41 U3.46

## Polygon pours and split planes (outlines as drawn)
"LED PWR" on L1 SIGNAL "NONET_L-01_P-001" (solid, pour order 17): 77.4,70.8 77.5,70.7 77.5,69.7 77.8,69.7 78.783,68.717 78.783,66.525 78.454,66.196 78.45,66.2 77.4,66.2 77.4,67.9 77.2,68.1 77.2,69.8 77,70 77,70.8
"LED PWR" on L1 SIGNAL "NONET_L-01_P-001" (solid, pour order 16): 77,70 77.4,70 cw(c77.4,69.1) 78.3,69.1 78.3,67.7 ccw(c78.9,67.7) 78.9,67.1 84.2,67.1 cw(c84.2,66) 85.3,66 85.3,65.9 cw(c84.9,65.9) 84.9,65.5 78.5,65.5 cw(c78.5,66.5) 77.5,66.5 77.5,68 ccw(c77.2,68) 77.2,68.3 77.2,69.8
GND on L1 SIGNAL "NONET_L-01_P-001" (solid, shelved, pour order 0): 66,76.4 66,75.4 65.9,75.3 64.4,75.3 64,74.9 63.1,74.9 63.1,75.9 63.6,76.4
GND on L3 GROUND "NONET_L-01_P-001" (solid, pour order 10): 58.007,88.093 93.207,88.093 cw(c93.207,86.393) 94.907,86.393 94.907,54.893 cw(c93.907,54.893) 93.907,53.893 57.707,53.893 57.407,53.993 57.207,54.193 cw(c58.112,54.896) 57.007,54.593 cw(c58.264,54.843) 57.007,55.093 57.007,87.093 cw(c58.007,87.093)
GND on L3 GROUND "NONET_L-01_P-001" (solid, pour order 9): 60.7,140.7 95.9,140.7 cw(c95.9,139) 97.6,139 97.6,107.5 cw(c96.6,107.5) 96.6,106.5 60.4,106.5 60.1,106.6 59.9,106.8 cw(c60.805,107.503) 59.7,107.2 cw(c60.957,107.45) 59.7,107.7 59.7,139.7 cw(c60.7,139.7)
GND on L3 GROUND "NONET_L-01_P-001" (solid, pour order 8): 60.6,140.7 95.8,140.7 cw(c95.8,139) 97.5,139 97.5,107.5 cw(c96.5,107.5) 96.5,106.5 60.3,106.5 60,106.6 59.8,106.8 cw(c60.705,107.503) 59.6,107.2 cw(c60.857,107.45) 59.6,107.7 59.6,139.7 cw(c60.6,139.7)
GND on L2 GROUND "NONET_L-01_P-001" (solid, pour order 7): 58,88.1 93.2,88.1 cw(c93.2,86.4) 94.9,86.4 94.9,54.9 cw(c93.9,54.9) 93.9,53.9 57.7,53.9 57.4,54 57.2,54.2 cw(c58.105,54.903) 57,54.6 cw(c58.257,54.85) 57,55.1 57,87.1 cw(c58,87.1)

## Silkscreen, mask and mechanical layers (free items; w line width, h text height)
Top Overlay:
  text "STM32 BOARD" at 83.854,83.954 h1
Mechanical 1:
  lines w0.2: 56.515,54.61 ccw(c57.785,54.61) 57.785,53.34 94.107,53.34 ccw(c94.107,54.61) 95.377,54.61 95.377,87.249 ccw(c94.107,87.249) 94.107,88.519 59.055,88.519 57.785,88.519 ccw(c57.785,87.249) 56.515,87.249 56.515,54.61

## Text inside footprints (layer, text, board x,y; h text height)
D1: Mechanical 13 "+" at 82.55,63.641 h0.5 r90
D2: Mechanical 13 "+" at 80.772,73.765 h0.5 r270